# EAGLE board arduino_Uno_RevG-MU (EAGLE 5.11)
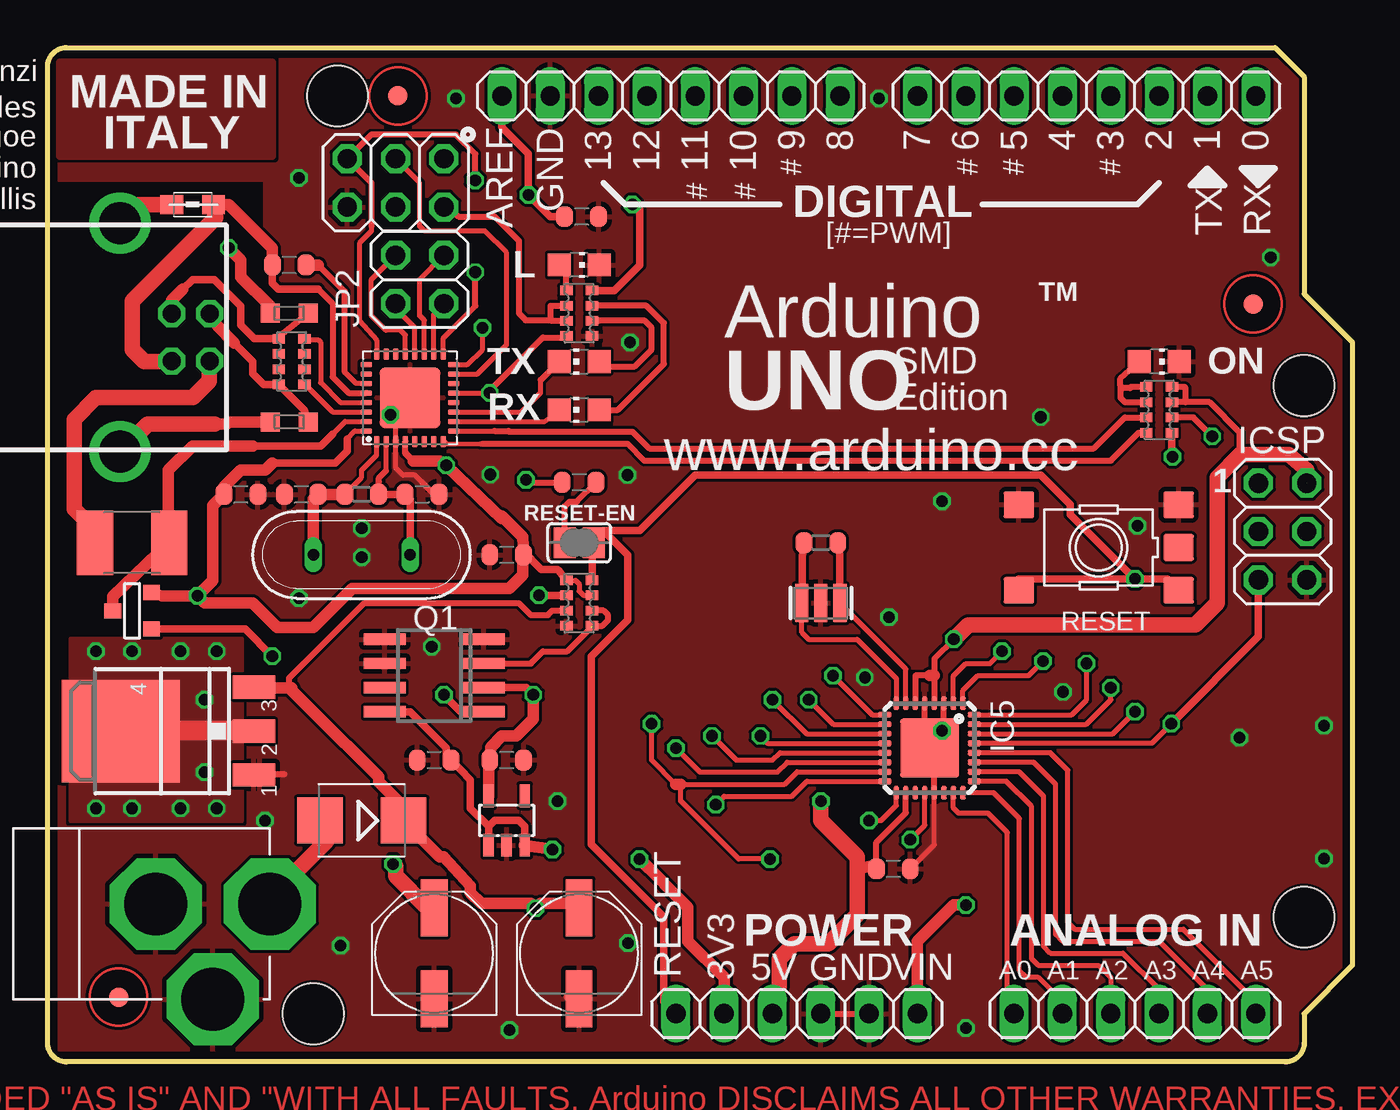
[diagram p0: board, top side]
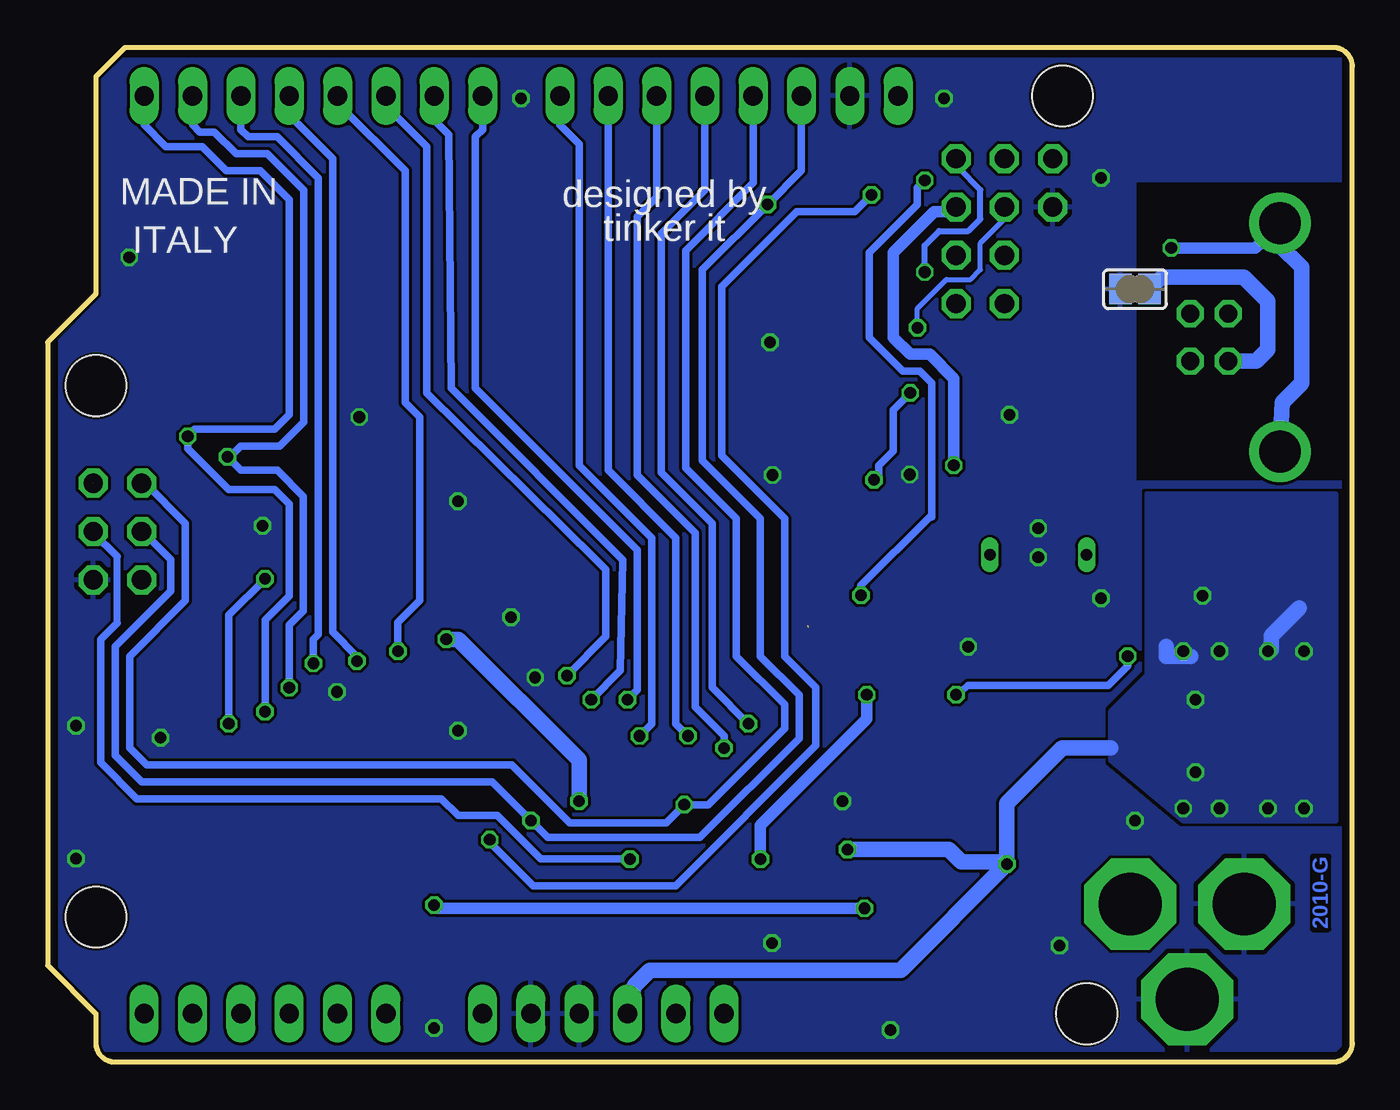
[diagram p1: board, bottom side, seen from below]

Size 68.58 x 53.34 mm. Coordinates in mm from the lower left corner, seen from the top.
Outline: 64.52,53.34 66.04,51.82 66.04,40.39 68.58,37.85 68.58,5.08 66.04,2.54 66.04,1 arc-90 65.04,0 1,0 arc-90 0,1 0,52.34 arc-90 1,53.34 64.52,53.34
Copper layers (1*16): Top 0.035mm / dielectric 1.5mm / Bottom 0.035mm
Design rules "default *": minimum track width 6mil, minimum drill 10mil, track to track 6mil, track to pad 6mil, pad to pad 6mil, via to via 6mil, smd to smd 6mil, copper to edge 6mil, drill to drill 6mil, minimum pad ring 6mil, minimum via ring 6mil, stop-mask expansion 1mil, vias tented up to drill 0mil, thermal gap 10mil
Net classes: 0 default: width 0.152 mm, clearance 0.152 mm; 1 power: width 0.406 mm, drill 0.61 mm, clearance 0.152 mm; 2 gnd: width 0.203 mm, drill 0.559 mm, clearance 0.152 mm; 3 usbvcc: width 0.203 mm, drill 0.61 mm, clearance 0.152 mm; 4 aref: width 0.203 mm, drill 0.61 mm, clearance 0.152 mm
Holes 3.2 mm at 66.04,35.56 66.04,7.62 15.24,50.8 13.97,2.54
vRestrict: area 22.9,44.1 to 24.6,49.1; area 25.4,45.5 to 27.1,49.1; area 28.4,45.3 to 29.6,48.8; area 31,45.3 to 32.1,48.8; area 33.5,45.3 to 34.7,48.8; area 36.1,45.3 to 37.2,48.8; area 38.7,47.2 to 39.9,48.8; area 40.3,45.1 to 47.6,46.9; area 60.3,44.2 to 61.7,46.7; area 62.9,44.2 to 64.3,46.7; area 61.3,35.8 to 64.8,37.2; area 0.6,21.8 to 2,30.1; 14 more areas

## Footprints (pad centres in the part's own frame; a part is rotated, then mirrored left to right if it is on the bottom)
1X06 = drill 1.016 long: 1 -6.35,0; 2 -3.81,0; 3 -1.27,0; 4 1.27,0; 5 3.81,0; 6 6.35,0
C0603-ROUND = smd 0.898 x 1.1: 1 -0.889,0; 2 0.889,0
SMB = smd 2.4 x 2.4: A 2.2,0; C -2.2,0
L1812 = smd 1.9 x 3.4: 1 -1.95,0; 2 1.95,0
SJ = smd 1.168 x 1.6: 1 -0.762,0; 2 0.762,0
SOT223 = smd 1.219 x 2.235: 1 -2.311,-3.099; 2 0,-3.099; 3 2.311,-3.099 | smd 3.6 x 2.2: 4 0,3.099
DPACK = smd 1 x 1.6: 1 -2.28,-4.8; 3 2.28,-4.8 | smd 5.4 x 6.2: 2 0,2.5
MLF32 = smd 0.7 x 0.3: 1 -2.35,1.75; 2 -2.35,1.25; 3 -2.35,0.75; 4 -2.35,0.25; 5 -2.35,-0.25; 6 -2.35,-0.75; 7 -2.35,-1.25; 8 -2.35,-1.75; 17 2.35,-1.75; 18 2.35,-1.25; 19 2.35,-0.75; 20 2.35,-0.25; 21 2.35,0.25; 22 2.35,0.75; 23 2.35,1.25; 24 2.35,1.75 | smd 0.3 x 0.7: 9 -1.75,-2.35; 10 -1.25,-2.35; 11 -0.75,-2.35; 12 -0.25,-2.35; 13 0.25,-2.35; 14 0.75,-2.35; 15 1.25,-2.35; 16 1.75,-2.35; 25 1.75,2.35; 26 1.25,2.35; 27 0.75,2.35; 28 0.25,2.35; 29 -0.25,2.35; 30 -0.75,2.35; 31 -1.25,2.35; 32 -1.75,2.35 | smd 3.1 x 3.1: PAD 0,0
2X03 = drill 1.016 octagon: 1 -2.54,-1.27; 2 -2.54,1.27; 3 0,-1.27; 4 0,1.27; 5 2.54,-1.27; 6 2.54,1.27
1X08 = drill 1.016 long: 1 -8.89,0; 2 -6.35,0; 3 -3.81,0; 4 -1.27,0; 5 1.27,0; 6 3.81,0; 7 6.35,0; 8 8.89,0
2X02 = drill 1.016 octagon: 1 -1.27,-1.27; 2 -1.27,1.27; 3 1.27,-1.27; 4 1.27,1.27
CHIP-LED0805 = smd 1.2 x 1.2: A 0,-1.05; C 0,1.05
0805 = smd 1.2 x 1: 1 -1.1,0; 2 1.1,0
PANASONIC_D = smd 3 x 1.4: + 2.4,0; - -2.4,0
QS = drill 0.61 long: 1 -2.54,0; 2 2.54,0
R0603-ROUND = smd 0.898 x 1.1: 1 -0.889,0; 2 0.889,0
TS42 = smd 1.6 x 1.4: 1 -4.2,2.25; 2 4.2,2.25; 3 -4.2,-2.25; 4 4.2,-2.25; 5 -4.2,0
CAY16 = smd 0.5 x 0.65: 1 -1.2,-0.675; 2 -0.4,-0.675; 3 0.4,-0.675; 4 1.2,-0.675; 5 1.2,0.675; 6 0.4,0.675; 7 -0.4,0.675; 8 -1.2,0.675
SOT-23 = smd 0.787 x 0.889: 1 0.025,-1.016; 2 -0.94,1.016; 3 0.991,1.016
SO08 = smd 0.6 x 2.2: 1 -1.905,-2.6; 2 -0.635,-2.6; 3 0.635,-2.6; 4 1.905,-2.6; 5 1.905,2.6; 6 0.635,2.6; 7 -0.635,2.6; 8 -1.905,2.6
SOT23-DBV = smd 0.55 x 1.2: 1 -0.95,-1.3; 2 0,-1.3; 3 0.95,-1.3; 4 0.95,1.3; 5 -0.95,1.3
QFN32 = smd 0.6 x 0.3: 1 -2.3,1.75; 2 -2.3,1.25; 3 -2.3,0.75; 4 -2.3,0.25; 5 -2.3,-0.25; 6 -2.3,-0.75; 7 -2.3,-1.25; 8 -2.3,-1.75; 17 2.3,-1.75; 18 2.3,-1.25; 19 2.3,-0.75; 20 2.3,-0.25; 21 2.3,0.25; 22 2.3,0.75; 23 2.3,1.25; 24 2.3,1.75 | smd 0.3 x 0.6: 9 -1.75,-2.3; 10 -1.25,-2.3; 11 -0.75,-2.3; 12 -0.25,-2.3; 13 0.25,-2.3; 14 0.75,-2.3; 15 1.25,-2.3; 16 1.75,-2.3; 25 1.75,2.3; 26 1.25,2.3; 27 0.75,2.3; 28 0.25,2.3; 29 -0.25,2.3; 30 -0.75,2.3; 31 -1.25,2.3; 32 -1.75,2.3 | smd 3.2 x 3.2: EXP 0,0
FIDUCIA-MOUNT = smd 1.016 x 1.016: P$1 0,0
DC-21MM = drill 3.302 pad 4.826 octagon: 1 -5.08,-3.353; 2 -0.076,-6.35; 3 -0.076,-0.356
PN61729 = drill 0.95 octagon: 1 1.25,4.71; 2 -1.25,4.71; 3 -1.25,2.71; 4 1.25,2.71 | drill 2.2 round: P$1 -6,0; P$2 6,0
RESONATOR = smd 0.7 x 2: 1 -1,0; 2 0,0; 3 1,0
CT/CN0603 = smd 1 x 1: 1 -1,0; 2 1,0

## Placement (x,y rotation side)
AD  [1X06]  57.15,2.54 0 top
C1  100n  [C0603-ROUND]  20.32,15.88 0 top
C2  100n  [C0603-ROUND]  10.16,29.84 180 top
C3  1u  [C0603-ROUND]  24.13,15.88 180 top
C4  100n  [C0603-ROUND]  28.07,44.45 180 top
C5  100n  [C0603-ROUND]  27.94,30.48 0 top
C6  100n  [C0603-ROUND]  44.45,10.16 180 top
C7  100n  [C0603-ROUND]  24.13,26.67 180 top
C8  1u  [C0603-ROUND]  12.7,41.91 180 top
C9  22p  [C0603-ROUND]  13.34,29.84 180 top
C11  22p  [C0603-ROUND]  19.68,29.84 0 top
D1  M7  [SMB]  16.51,12.7 180 top
F1  500mA  [L1812]  4.45,27.3 180 top
GROUND  [SJ]  11.43,40.64 0 bottom
IC1  MC33269ST-5.0T3  [SOT223]  7.75,17.4 90 top
IC2  MC33269D-5.0  [DPACK]  6.35,17.4 90 top
IC5  ATMEGA328P-20MU  [MLF32]  46.35,16.51 270 top
ICSP  ICSP  [2X03]  64.91,27.89 270 top
ICSP1  ICSP  [2X03]  18.29,46.23 180 top
IOH  [1X08]  32.77,50.8 180 top
IOL  [1X08]  54.61,50.8 180 top
JP2  [2X02]  19.56,41.15 90 top
L  YELLOW  [CHIP-LED0805]  27.94,41.91 270 top
L1  BLM21  [0805]  7.62,45.09 180 top
ON  GREEN  [CHIP-LED0805]  58.42,36.83 270 top
PC1  47u  [PANASONIC_D]  27.94,5.71 90 top
PC2  47u  [PANASONIC_D]  20.32,5.71 90 top
POWER  [1X06]  39.37,2.54 0 top
Q1  16MHz  [QS]  16.51,26.67 180 top
R1  1M  [R0603-ROUND]  16.51,29.84 0 top
R2  1M  [R0603-ROUND]  40.64,27.3 180 top
RESET  TS42  [TS42]  55.24,27.05 180 top
RESET-EN  [SJ]  27.94,27.3 0 top
RN1  10K  [CAY16]  27.94,24.13 90 top
RN2  1K  [CAY16]  27.94,39.37 270 top
RN3  22R  [CAY16]  12.83,36.83 90 top
RN4  1K  [CAY16]  58.42,34.29 90 top
RX  YELLOW  [CHIP-LED0805]  27.94,34.29 90 top
T1  FDN340V  [SOT-23]  4.45,23.75 270 top
TX  YELLOW  [CHIP-LED0805]  27.94,36.83 90 top
U1  LMV358D  [SO08]  20.32,20.32 90 top
U2  LP2985-33DBVR  [SOT23-DBV]  24.13,12.7 0 top
U3  ATMEGA8U2-MU  [QFN32]  19.05,34.92 90 top
U$3  FIDUCIALMOUNT  [FIDUCIA-MOUNT]  18.41,50.8 0 top
U$4  FIDUCIALMOUNT  [FIDUCIA-MOUNT]  63.37,39.85 0 top
U$6  FIDUCIALMOUNT  [FIDUCIA-MOUNT]  3.73,3.41 0 top
X1  DC21MMX  [DC-21MM]  5.33,8.38 90 top
X2  [PN61729]  3.81,38.1 270 top
Y2  16MHz  [RESONATOR]  40.64,24.13 0 top
Z1  PGB1010604  [CT/CN0603]  12.7,39.37 180 top
Z2  PGB1010604  [CT/CN0603]  12.7,33.66 180 top

## Library data of the parts
AD ICSP ICSP1 IOH IOL JP2 POWER = pinhead
C1-C9 C11 R1 R2 U$3 U$4 U$6 X2 Y2 = SmartPrj
D1 = diode
F1 PC1 PC2 = rcl
GROUND RESET-EN = jumper
IC1 IC2 U1 = linear
IC5 = idii
L ON RX TX = led
L1 = wuerth-elektronik
Q1 = special
RESET = st-mod v1.4
RN1-RN4 = resistor-dil
T1 = zetex
U2 = texas
U3 = atmel
X1 = powersupply
Z1 Z2 = varistor

## Nets
5-GND: RESET.5
+3V3: C3.2 POWER.2 U1.2 U2.5
+5V [usbvcc]: C1.2 C2.2 C6.2 C7.1 IC1.2 IC1.4 IC2.2 IC5.4 IC5.6 IC5.18 ICSP1.2 ICSP.2 PC2.+ POWER.3 RN1.3 RN1.5 RN2.2 RN2.3 RN4.3 RN4.4 T1.2 U1.8 U2.1 U2.3 U3.4 U3.32
AD0: AD.1 IC5.23
AD1: AD.2 IC5.24
AD2: AD.3 IC5.25
AD3: AD.4 IC5.26
AD4: AD.5 IC5.27
AD5: AD.6 IC5.28
AREF [aref]: C4.2 IC5.20 IOH.8
CMP: RN1.1 RN1.2 U1.3
D+: RN3.5 X2.3 Z1.1
D-: RN3.8 X2.2 Z2.1
DTR: C5.1 RN2.4 U3.13
GATE_CMD: T1.3 U1.1
GND [gnd]: C1.1 C2.1 C3.1 C4.1 C6.1 C7.2 C9.2 C11.2 GROUND.1 IC1.1 IC2.1 IC5.3 IC5.5 IC5.21 ICSP1.6 ICSP.6 IOH.7 L.C ON.C PC1.- PC2.- POWER.4 POWER.5 RESET.3 RESET.4 RN1.8 RN2.5 U1.4 U1.5 U1.6 U2.2 U3.3 U3.EXP X1.1 X1.3 Y2.2
IO0: IC5.30 IOL.1 RN4.2
IO1: IC5.31 IOL.2 RN4.1
IO2: IC5.32 IOL.3
IO3: IC5.1 IOL.4
IO4: IC5.2 IOL.5
IO5: IC5.9 IOL.6
IO6: IC5.10 IOL.7
IO7: IC5.11 IOL.8
IO8: IC5.12 IOH.1
IO9: IC5.13 IOH.2
M8RXD: RN4.7 U3.9
M8TXD: RN4.8 U3.8
MISO: IC5.16 ICSP.1 IOH.5
MISO2: ICSP1.1 U3.17
MOSI: IC5.15 ICSP.4 IOH.4
MOSI2: ICSP1.4 U3.16
N$1: L.A RN2.1
N$2: JP2.1 U3.18
N$3: ON.A RN4.5 RN4.6
N$4: JP2.3 U3.19
N$5: JP2.2 U3.20
N$6: JP2.4 U3.21
N$35: RN2.7 RX.A
N$36: RN2.6 TX.A
PWRIN [power]: D1.A X1.2
RD+: RN3.4 U3.29
RD-: RN3.1 U3.30
RESET: C5.2 IC5.29 ICSP.5 POWER.1 RESET-EN.1 RESET-EN.2 RESET.1 RESET.2 RN1.4
RESET2: ICSP1.5 RN1.6 U3.24
RXLED: RX.C U3.10
SCK: IC5.17 ICSP.3 IOH.6 RN2.8
SCK2: ICSP1.3 U3.15
SS: IC5.14 IOH.3
TXLED: TX.C U3.11
UGND [gnd]: C8.2 GROUND.2 L1.1 U3.28 X2.4
USBVCC [usbvcc]: F1.1 T1.1 U3.31
USHIELD [gnd]: L1.2 X2.P$1 X2.P$2 Z1.2 Z2.2
VIN [power]: D1.C IC1.3 IC2.3 PC1.+ POWER.6 RN1.7
VUCAP: C8.1 U3.27
XT1: C9.1 Q1.2 R1.1 U3.1
XT2: C11.1 Q1.1 R1.2 U3.2
XTAL1: IC5.7 R2.1 Y2.3
XTAL2: IC5.8 R2.2 Y2.1
XUSB [usbvcc]: F1.2 X2.1

## Tracks (layer width: path | path; a pad name or v marks a point on that pad's centre or on a via)
+3V3  (via drill 0.61)
  Top 0.406: U1.2 25.15,19.68 v25.53,19.3
  Top 0.61: POWER.2 35.56,4.45 33.66,6.35 33.66,8.13 v31.11,10.67 31.62,10.16 | U2.5 23.18,15.78 C3.2 23.28,16.55 23.88,17.14 24.64,17.14 25.53,18.03 v25.53,19.3
  Bottom 0.61: v31.11,10.67 30.99,10.54 31.11,10.54 31.11,12.45 25.53,18.03 v25.53,19.3
+5V  (via drill 0.61)  (1 unrouted)
  Top 0.254: U3.32 16.16,33.17 15.75,32.77 | RN1.3 28.18,24.53 27.94,24.77 27.94,25.15 27.76,25.33 RN1.5
  Top 0.305: 18.8,32.02 U3.4 | 59.82,34.69 61.07,34.69 62.66,33.1 62.66,31.93 | 59.82,34.69 RN4.3 | RN4.4 59.76,35.49 59.82,35.43 59.82,34.69 | RN2.2 26.43,39.77 26.43,39.01 | ICSP1.2 21.08,44.96 21.59,44.45 23.5,44.45 24.77,43.18 24.77,39.37 25.13,39.01 26.43,39.01 | RN2.3 26.47,38.97 26.43,39.01 | IC5.4 46.6,20.32 46.6,21.2 v47.62,22.23 | IC5.6 45.6,20.32 46.35,20.32 | C6.2 43.56,11.56 45.1,13.1 IC5.18
  Top 0.356: 19.23,31.6 18.8,32.02
  Top 0.406: 23.18,12.38 U2.1 | 23.18,12.38 23.5,12.7 24.77,12.7 25.08,12.38 U2.3 | U1.8 19.05,18.41 20.95,16.51 20.95,16.09 C1.2 22.23,14.82 22.23,13.34 23.18,12.38 | RN1.5 26.87,25.84 26.8,25.91 25.96,25.91 24.98,26.89 | 11.81,31.5 15.11,31.5 15.75,32.13 15.75,32.77
  Top 0.508: 11.02,17.42 IC1.2
  Top 0.61: U2.3 25.05,11.4 v26.54,11.18 | C6.2 43.6,10.38 42.55,10.16 | T1.2 6.02,24.51 v7.87,24.51 | v7.87,24.51 8.68,25.31 8.68,29.25 C2.2 9.27,30.23 10.16,31.11 11.43,31.11 11.81,31.5 | v7.87,24.51 8.26,24.13 10.79,24.13 12.06,22.86 13.97,22.86 16,24.89 24.26,24.89 24.98,25.61 24.98,26.89 C7.1 24.98,27.6 23.88,28.7 23.88,28.57 v20.95,31.37 20.6,31.6 19.23,31.6 | 46.6,20.32 46.35,20.32
  Top 0.813: POWER.3 38.46,4.01 38.46,5.44 39.24,6.22 41.02,6.22 42.55,7.75 42.55,10.16 42.55,10.79 40.64,12.7 v40.64,13.72 | 66.17,30.44 66.17,31.11 65.23,31.93 62.66,31.93 61.47,30.73 61.47,24.13 60.33,22.99 48.39,22.99 v47.62,22.23 | PC2.+ 19.95,8.12 18.29,9.78 18.29,10.29 v18.16,10.41
  Top 1.016: IC1.4 5.84,17.4 5.87,17.42 11.02,17.42
  Bottom 0.61: 20.56,10.53 20.57,10.54 | v4.45,21.59 4.27,21.67 | v20.95,31.37 20.95,35.94 22.23,37.21 23.24,37.21 24.13,38.1 24.13,42.55 21.97,44.7 21.08,44.7 ICSP1.2
  Bottom 0.813: POWER.3 37.74,4.01 36.93,4.83 23.75,4.83 v18.16,10.41 | v8.89,21.59 8.51,21.34 9.78,21.34 9.78,21.84 | 4.27,21.67 4.27,22.4 2.79,23.88 | 12.7,16.51 15.24,16.51 18.16,13.59 v18.16,10.41 | 20.57,10.54 21.21,11.18 v26.54,11.18 | 20.56,10.53 18.27,10.53 v18.16,10.41 | v40.64,13.72 40.64,15.88 46.99,22.23 v47.62,22.23
  other vias: 2.54,21.59 6.99,21.59 2.54,13.34 4.45,13.34 6.99,13.34 8.89,13.34 8.26,15.24 8.26,19.05
  pour Top (no thermals): 1.91,21.59 2.54,22.23 8.26,22.23 10.16,20.32 10.16,14.61 8.26,12.7 2.54,12.7 1.91,13.34
  pour Bottom (no thermals): 0.89,29.84 9.53,29.84 10.79,29.84 10.79,20.32 12.7,18.41 12.7,15.88 8.89,12.7 0.89,12.7
  pour Top (no thermals): 1.91,21.59 2.54,22.23 8.26,22.23 10.16,20.32 10.16,14.61 8.26,12.7 2.54,12.7 1.91,13.34
  pour Top (no thermals): 1.27,12.7 1.27,22.23 10.16,22.23 10.16,12.7
AD0
  Top 0.254: AD.1 50.44,3 50.44,12.06 49.43,13.08 47.88,13.08 47.6,13.36 IC5.23
AD1
  Top 0.254: IC5.24 49.72,14.16 51.08,12.8 51.08,4.8 51.44,4.45 52.07,4.45 53.34,3.17 AD.2
AD2
  Top 0.254: IC5.25 50.39,14.76 51.71,13.44 51.71,5.44 52.07,5.08 55.24,5.08 55.88,4.45 AD.3
AD3
  Top 0.254: IC5.26 51.06,15.26 52.35,13.97 52.35,6.07 52.7,5.71 56.52,5.71 58.42,3.81 AD.4
AD4
  Top 0.254: IC5.27 51.83,15.76 52.98,14.61 52.98,6.71 53.34,6.35 58.42,6.35 60.96,3.81 AD.5
AD5
  Top 0.254: IC5.28 52.7,16.26 53.62,15.34 53.62,7.34 53.98,6.99 59.69,6.99 63.5,3.17 AD.6
AREF  (via drill 0.61)
  Top 0.254: IC5.20 46.1,12.45 v45.34,11.68
  Top 0.406: IOH.8 23.88,49.15 25.27,47.75 v25.27,45.59 26.42,44.45 C4.2
  Bottom 0.406: v25.27,45.59 26.16,44.7 29.21,44.7 33.15,40.77 33.15,31.88 29.84,28.57 29.84,21.34 28.19,19.68 28.19,16.64 35.56,9.27 43.05,9.27 45.47,11.68 v45.34,11.68
CMP  (1 unrouted)
  Top 0.305: U1.3 25.4,20.95 26.04,21.59 27.3,21.59 28.57,22.86 | RN1.2 29.23,23.73 29.46,23.5 29.46,23.24 29.15,22.93 RN1.1
D+
  Top 0.305: Z1.1 12.1,38.1 RN3.5
  Top 0.406: 7.11,40.64 7.62,41.15 8.76,41.15 10.16,39.75 10.16,38.73 10.87,38.03 RN3.5
  Top 0.61: X2.3 6.52,40.05 7.11,40.64
D-
  Top 0.406: 9.82,37.81 10.79,36.83 10.79,36.2 11.36,35.63 RN3.8 13.49,34.29 Z2.1
  Top 0.61: X2.2 8.91,38.72 9.82,37.81
DTR  (via drill 0.61)
  Top 0.254: U3.13 23.12,35.17 v23.24,35.18
  Top 0.305: C5.1 25.27,30.48 v25.15,30.61 | RN2.4 27.2,38.1 26.04,38.1 23.24,35.31 v23.24,35.18
  Bottom 0.406: v23.24,35.18 24.13,34.29 24.13,32.13 24.89,31.37 24.89,30.86 v25.15,30.61 25.27,30.48
GATE_CMD  (via drill 0.61)
  Top 0.406: U1.1 21.72,18.41 v20.83,19.3 | v11.81,21.34 10.39,22.76 T1.3
  Bottom 0.406: v11.81,21.34 11.81,20.83 12.83,19.81 20.19,19.81 v20.83,19.3
GND  (via drill 0.61)
  Top 0.254: 18.3,33.9 18.55,33.64 | 18.3,33.9 U3.3 18.3,31.23 18.67,30.86 19.3,30.86 19.68,30.48 | IC5.21 46.6,11.43 C6.1 | 46.6,16.26 46.1,16.76 | v47.02,17.42 47.1,17.51 | U3.EXP 18.92,34.92 v18.03,34.04 18.16,34.04 18.3,33.9
  Top 0.305: POWER.4 POWER.5 | IC2.1 12.45,15.14 IC1.1 | 19.86,3.3 PC2.- | C11.2 20.32,29.84 19.68,30.48 | 46.1,16.76 IC5.5 | IC5.21 46.6,16.26 | 47.1,17.51 IC5.3
  Top 0.406: 27.3,3.43 PC1.-
  Bottom 0.305: GROUND.1 10.79,40.64
  other vias: 30.51,6.25 26.8,13.72 15.39,6.12 23.27,30.89 52.2,33.91 30.61,37.85 11.43,12.7 53.37,19.46 30.48,30.86 43.69,50.67 48.26,1.78 16.51,28.07 57.28,28.19 24.28,1.68 67.08,10.69 64.29,42.32 13.21,24.38 67.08,17.68 20.19,21.84 13.21,46.48 21.46,50.67 47.02,29.49 16.51,26.54 62.64,17.04 44.22,23.39 42.95,20.22
  pour Bottom (rank 2): 0.64,52.7 67.69,52.7 67.94,52.45 67.94,0.64 0.89,0.64 0.64,0.89 0.64,30.48 11.43,30.48 11.43,46.35 0.64,46.35
  pour Top (rank 2): 0.64,52.7 67.94,52.7 67.94,0.64 0.64,0.64 0.64,30.48 11.43,30.48 11.43,46.35 0.64,46.35
IO0  (via drill 0.61)
  Top 0.254: IC5.30 55.99,17.26 v57.15,18.41
  Top 0.305: RN4.2 60.22,33.89 v61.21,32.89
  Bottom 0.406: IOL.1 63.5,49.28 62.36,48.13 60.45,48.13 59.18,46.86 57.4,46.86 55.88,45.34 55.88,34.04 56.64,33.27 60.83,33.27 v61.21,32.89 61.21,32.26 59.05,30.1 56.64,30.1 55.88,29.34 55.88,24.51 57.15,23.24 v57.15,18.41
IO1  (via drill 0.61)
  Top 0.254: IC5.31 54.59,17.76 55.88,19.05 v55.88,19.68
  Top 0.406: RN4.1 59.09,31.86 v59.13,31.83
  Bottom 0.406: 60.96,50.55 IOL.2 60.96,49.28 60.58,48.9 59.82,48.9 58.67,47.75 57.02,47.75 55.12,45.85 55.12,33.66 56.39,32.38 58.42,32.38 58.85,31.95 59,31.95 v59.13,31.83 58.42,31.11 56.52,31.11 55.14,29.74 55.14,23.72 55.88,22.99 v55.88,19.68
IO2  (via drill 0.61)
  Top 0.254: IC5.32 53.82,18.26 54.61,19.05 v54.61,20.95
  Bottom 0.406: 58.42,50.42 IOL.3 58.42,49.02 58.04,48.64 56.52,48.64 54.36,46.48 54.36,22.48 54.61,22.23 v54.61,20.95
IO3  (via drill 0.61)
  Top 0.254: IC5.1 48.1,19.53 48.9,20.32 51.56,20.32 v52.32,21.08
  Bottom 0.406: IOL.4 55.88,49.78 53.59,47.5 53.59,22.61 52.32,21.34 v52.32,21.08
IO4  (via drill 0.61)
  Top 0.254: IC5.2 47.6,20.3 48.26,20.95 49.53,20.95 v50.16,21.59
  Bottom 0.406: IOL.5 53.21,50.29 49.78,46.86 49.78,34.67 49.02,33.91 49.02,24.26 50.16,23.11 v50.16,21.59
IO5  (via drill 0.61)
  Top 0.254: IC5.9 43.34,18.26 v41.27,20.32
  Bottom 0.406: 39.69,26.35 39.37,26.04 | 39.69,26.35 48.64,35.18 48.64,48.13 50.8,50.29 IOL.6 | 39.69,26.35 39.23,25.9 39.23,22.36 v41.27,20.32
IO6  (via drill 0.61)
  Top 0.254: IC5.10 41.3,17.76 v40.01,19.05
  Bottom 0.406: IOL.7 48.26,49.53 47.5,48.77 47.37,35.43 38.34,26.41 38.47,20.58 v40.01,19.05
IO7  (via drill 0.61)
  Top 0.254: IC5.11 39.89,17.26 v38.1,19.05
  Bottom 0.406: IOL.8 45.72,49.02 46.1,48.64 46.1,35.43 37.58,26.91 37.58,19.57 v38.1,19.05
IO8  (via drill 0.61)
  Top 0.254: IC5.12 37.85,16.76 v37.47,17.14
  Bottom 0.406: IOH.1 41.66,49.28 40.64,48.26 40.64,31.37 36.83,27.56 36.83,17.78 v37.47,17.14
IO9  (via drill 0.61)
  Top 0.254: IC5.13 38.48,16.26 38.1,15.88 36.2,15.88 v34.92,17.14
  Bottom 0.406: IOH.2 39.12,31.11 35.56,27.56 35.56,17.78 v34.92,17.14
M8RXD
  Top 0.254: U3.9 23.5,33.17
  Top 0.305: RN4.7 56.62,33.89 54.99,32.26 31.62,32.26 30.73,33.15 24.26,33.15 24.23,33.17 23.5,33.17
M8TXD
  Top 0.254: U3.8 20.84,32.62 20.95,32.51 22.75,32.5 22.86,32.51
  Top 0.305: RN4.8 57.35,33.09 55.88,31.62 31.37,31.62 30.48,32.51 22.86,32.51
MISO  (via drill 0.61)
  Top 0.254: IC5.16 39.91,14.76 39.12,13.97 35.56,13.97 v35.12,13.53
  Bottom 0.406: IOH.5 31.5,46.23 35.05,42.67 35.05,31.24 32.38,28.57 32.38,21.34 29.84,18.8 29.84,17.53 33.85,13.53 v35.12,13.53 36.07,12.57 41.15,12.57 44.2,15.62 63.37,15.62 64.26,16.51 64.26,21.34 61.34,24.26 61.34,28.32 63.45,30.43 ICSP.1
MISO2  (via drill 0.61)
  Top 0.254: U3.17 20.8,38.07 22.48,39.75
  Top 0.305: 22.48,39.75 v22.48,41.53
  Bottom 0.305: v22.48,41.53 22.48,42.93 21.72,43.69 20.19,43.69 19.56,44.32 19.56,45.85 20.7,46.99 20.83,47.12 ICSP1.1
MOSI  (via drill 0.61)
  Top 0.254: v31.75,17.78 31.75,15.88 33.02,14.61 | IC5.15 39.39,15.26 38.73,14.61 33.27,14.61 33.27,13.72 36.32,10.67 v37.97,10.67
  Top 0.61: 33.27,14.61 33.02,14.61
  Bottom 0.381: 64.92,23.09 64.92,26.57
  Bottom 0.406: IOH.4 34.04,45.85 36.32,43.56 36.32,30.99 33.66,28.32 33.66,19.68 v31.75,17.78 | ICSP.4 66.18,27.83 64.92,26.57 | 64.92,23.09 65.79,22.23 65.79,15.75 63.88,13.84 47.88,13.84 46.99,12.95 44.96,12.95 42.67,10.67 v37.97,10.67
MOSI2  (via drill 0.61)
  Top 0.254: U3.16 22.07,36.67 22.86,37.47 v22.86,38.61
  Bottom 0.254: v22.86,38.61 22.86,39.62 21.34,41.15 20.07,41.15 19.56,41.66 19.56,43.05 18.29,44.32 ICSP1.4
N$1
  Top 0.305: RN2.1 27.27,41.53 L.A
N$2
  Top 0.254: U3.18 20.3,39.35 JP2.1
N$3
  Top 0.305: RN4.6 56.62,34.69 56.39,34.92 56.39,35.56 | 56.39,35.56 56.39,35.94 ON.A | RN4.5 56.95,35.49 56.9,35.43 56.52,35.43 56.39,35.56
N$4
  Top 0.254: U3.19 19.8,39 19.56,39.24 19.56,41.15 JP2.3
N$5
  Top 0.254: U3.20 19.3,38.61 18.29,39.62 JP2.2
N$6
  Top 0.254: JP2.4 17.02,41.15 17.02,39.24 17.78,38.48 18.54,38.48 18.8,38.22 U3.21
N$27
  pour Top: 0.64,52.58 11.81,52.58 11.81,47.62 0.64,47.62
N$35
  Top 0.305: RX.A 29.97,34.29 32.38,36.7 32.38,38.86 31.48,39.77 RN2.7
N$36
  Top 0.305: TX.A 29.25,36.57 30.86,36.57 31.75,37.47 31.75,38.61 31.39,38.97 RN2.6 28.98,38.97
PWRIN
  Top 0.61: 14.68,11.63 D1.A
  Top 0.813: 14.68,11.63 13.21,10.16 X1.2
RD+
  Top 0.254: U3.29 15.39,34.67 14.35,35.71 14.35,37.85 14.22,37.97 13.56,37.97 RN3.4
RD-
  Top 0.254: U3.30 14.99,34.17 13.53,35.63 RN3.1
RESET  (via drill 0.61)
  Top 0.254: IC5.29 58.03,16.76 v59.05,17.78
  Top 0.305: RESET-EN.1 27.18,29.21 27.43,29.46 27.81,29.46 C5.2 | 29.84,27.94 29.86,27.92
  Top 0.406: RESET-EN.2 RESET-EN.1 | ICSP.5 63.64,22.36 v59.05,17.78 | 29.21,27.94 RESET-EN.2 | 29.21,27.94 29.84,27.94 31.11,27.94 34.04,30.86 52.2,30.86 53.76,29.3 53.76,28.79 v57.15,25.4 | v57.15,25.4 58.85,25.4 RESET.1 | POWER.1 32.38,3.17 32.38,7.62 28.57,11.43 28.57,21.34 30.48,23.24 30.48,26.67 29.21,27.94 | v57.15,25.4 51.05,25.4 RESET.2 | RN1.4 28.61,27.85 RESET-EN.2
  Bottom 0.406: v59.05,17.78 59.05,23.5 v57.15,25.4
RESET2  (via drill 0.61)
  Top 0.254: U3.24 17.3,37.95 16.38,38.99 16.38,43.05 17.02,43.69 17.02,43.94
  Top 0.305: v22.48,46.35 22.48,47.75 21.46,48.77 17.02,48.77 ICSP1.5 17.02,46.23 17.02,43.94
  Top 0.406: RN1.6 v25.84,24.53 v25.83,24.54
  Bottom 0.406: v22.48,46.35 22.86,45.97 22.86,45.09 25.4,42.55 25.4,38.1 23.62,36.32 22.73,36.32 22.1,35.69 22.1,28.65 22.23,28.65 25.83,25.04 v25.83,24.54
RXLED
  Top 0.254: U3.10 26.14,33.67 RX.C
SCK  (via drill 0.61)
  Top 0.254: IC5.17 44.6,13.49 43.81,12.7 v43.18,12.7
  Top 0.406: RN2.8 29.77,40.57 31.11,41.91 31.11,44.83 v30.73,45.09
  Bottom 0.406: ICSP.3 63.58,27.89 62.1,26.42 62.1,24.77 65.02,21.84 65.02,16.13 63.63,14.73 45.21,14.73 v43.18,12.7 42.29,11.81 34.29,11.81 29.08,17.02 29.08,19.3 31.11,21.34 31.11,28.57 34.16,31.62 34.16,41.66 v30.73,45.09 28.96,46.86 IOH.6
SCK2
  Top 0.254: ICSP1.3 19.56,46.23 19.56,43.94 19.81,43.69 22.99,43.69 24.13,42.55 24.13,37.72 22.59,36.17 U3.15
SS  (via drill 0.61)
  Top 0.254: IC5.14 38.87,15.76 38.35,15.24 34.29,15.24 v33.02,16.51
  Bottom 0.406: IOH.3 36.58,45.47 37.59,44.45 37.59,30.86 34.54,27.81 34.54,18.67 33.02,17.14 v33.02,16.51
TXLED
  Top 0.254: U3.11 24.9,34.17 25.92,35.19 25.92,35.86
  Top 0.305: 25.92,35.86 TX.C
UGND
  Top 0.305: U3.28 15.83,35.17 14.99,36.02 14.99,39.88 14.22,40.64
  Top 0.406: C8.2 11.81,40.96 12.13,40.64 14.22,40.64
  Top 0.61: L1.1 9.53,45.09 11.81,42.8 C8.2
  Top 0.813: L1.1 8.85,44.41 4.45,40.01 4.45,37.47 5.08,36.83 6.5,36.83 X2.4
  Bottom 0.813: X2.4 5.06,36.85 4.45,37.47 4.45,40.01 5.71,41.27 10.03,41.27 GROUND.2
USBVCC
  Top 0.254: U3.31 15.64,33.67 14.99,33.02
  Top 0.406: 10.79,32.38 14.35,32.38 14.99,33.02
  Top 0.61: T1.1 3.43,24.47 F1.1 6.35,27.35 6.35,31.11 7.62,32.38 10.79,32.38
USHIELD  (via drill 0.61)
  Top 0.61: 8.78,33.54 9.41,33.54 9.53,33.66 Z2.2 | Z1.2 11.7,39.73 10.16,41.27 10.16,42.16 v9.53,42.8
  Top 0.813: L1.2 4.79,45.09 X2.P$1 | 8.78,33.54 5.25,33.54 X2.P$2
  Bottom 0.61: v9.53,42.8 5.11,42.8 X2.P$1
  Bottom 0.813: X2.P$2 3.68,34.67 2.67,35.69 2.67,41.78 3.81,42.93 X2.P$1
VIN  (via drill 0.61)
  Top 0.305: 12.7,19.68 12.7,20.18 16.65,24.13 24.77,24.13 25.4,23.5 26.29,23.5 26.52,23.73 RN1.7
  Top 0.61: PC1.+ 27.25,8.33 25.91,8.33 v25.65,8.08 25.4,8.33 22.78,8.33 22.23,8.89 22.23,9.27 20.83,10.79 20.61,10.79 D1.C 19.05,12.7 18.41,13.34 18.41,13.72 17.4,14.73 17.4,14.99 13.97,18.41 12.7,19.68 | v48.26,8.26 47.62,8.26 45.72,6.35 POWER.6 | IC1.3 11.75,19.71 IC2.3 12.7,19.68 | 12.7,19.68 12.84,19.68 12.7,19.68
  Bottom 0.61: v25.65,8.08 48.08,8.08 v48.26,8.26
VUCAP
  Top 0.254: U3.27 16.22,35.67 15.62,36.27
  Top 0.305: 15.62,36.27 15.62,40.51 14.22,41.91
  Top 0.61: 14.22,41.91 C8.1
XT1
  Top 0.254: U3.1 17.3,31.91 16.51,31.11 16.51,30.73 R1.1
  Top 0.61: Q1.2 13.97,29.59 C9.1 R1.1
XT2
  Top 0.254: 17.8,31.09 U3.2
  Top 0.305: R1.2 17.42,30.5 17.42,30.71 17.8,31.09
  Top 0.406: R1.2 C11.1 19.05,29.59 Q1.1
XTAL1
  Top 0.254: IC5.7 45.1,20.66 Y2.3
  Top 0.406: Y2.3 41.64,26.65 R2.1
XTAL2
  Top 0.254: IC5.8 44.6,20.16 42.55,22.23 40.01,22.23 39.64,22.59 Y2.1
  Top 0.406: Y2.1 39.66,24.15 39.66,26.54 R2.2
XUSB
  Top 0.813: F1.2 2.5,27.98 1.4,29.08 1.4,33.78 2.54,34.92 7.62,34.92 8.51,35.81 X2.1

## Text on the board
Top: Reference Designs ARE PROVIDED "AS IS" AND "WITH ALL FAULTS. Arduino DISCLAIMS ALL OTHER WARRANTIES, EXPRESS OR IMPLIED, | REGARDING PRODUCTS, INCLUDING BUT NOT LIMITED TO, ANY IMPLIED WARRANTIES OF MERCHANTABILITY OR FITNESS FOR A PARTICULAR PURPOSE | Arduino may make changes to specifications and product descriptions at any time, without notice. The Customer must not | rely on the absence or characteristics of any features or instructions marked "reserved" or "undefined." Arduino reserves | these for future definition and shall have no responsibility whatsoever for conflicts or incompatibilities arising from future changes to them. | The product information on the Web Site or Materials is subject to change without notice. Do not finalize a design with this information.
Bottom: 2010-G
tPlace: MADE IN | 13 | 12 | 11 | 10 | 9 | 8 | 7 | 6 | 5 | 4 | 3 | 2 | 1 | 0 | ITALY | SMD | Edition
tNames: M.Banzi | D.Cuartielles | T.Igoe | AREF | GND | G.Martino | # | # | # | # | D.Mellis | # | # | DIGITAL | [#=PWM] | TX | RX | TM | TX | Arduino | RX | UNO | www.arduino.cc | 1 | ANALOG IN | RESET | 3V3 | 5V | GND | VIN | A0 | A1 | A2 | A3 | A4 | A5
bNames: MADE IN | designed by | MADE IN | ITALY | tinker it | ITALY | designed by | tinker it | ATMEGA328
ReferenceLC: L | TX | RX | PC1 | PC2
214bmp: D:/SmartProjects/Snc/a4_bn_logo2.bmp